# EAGLE board scrambler_v2 (EAGLE 5.06)
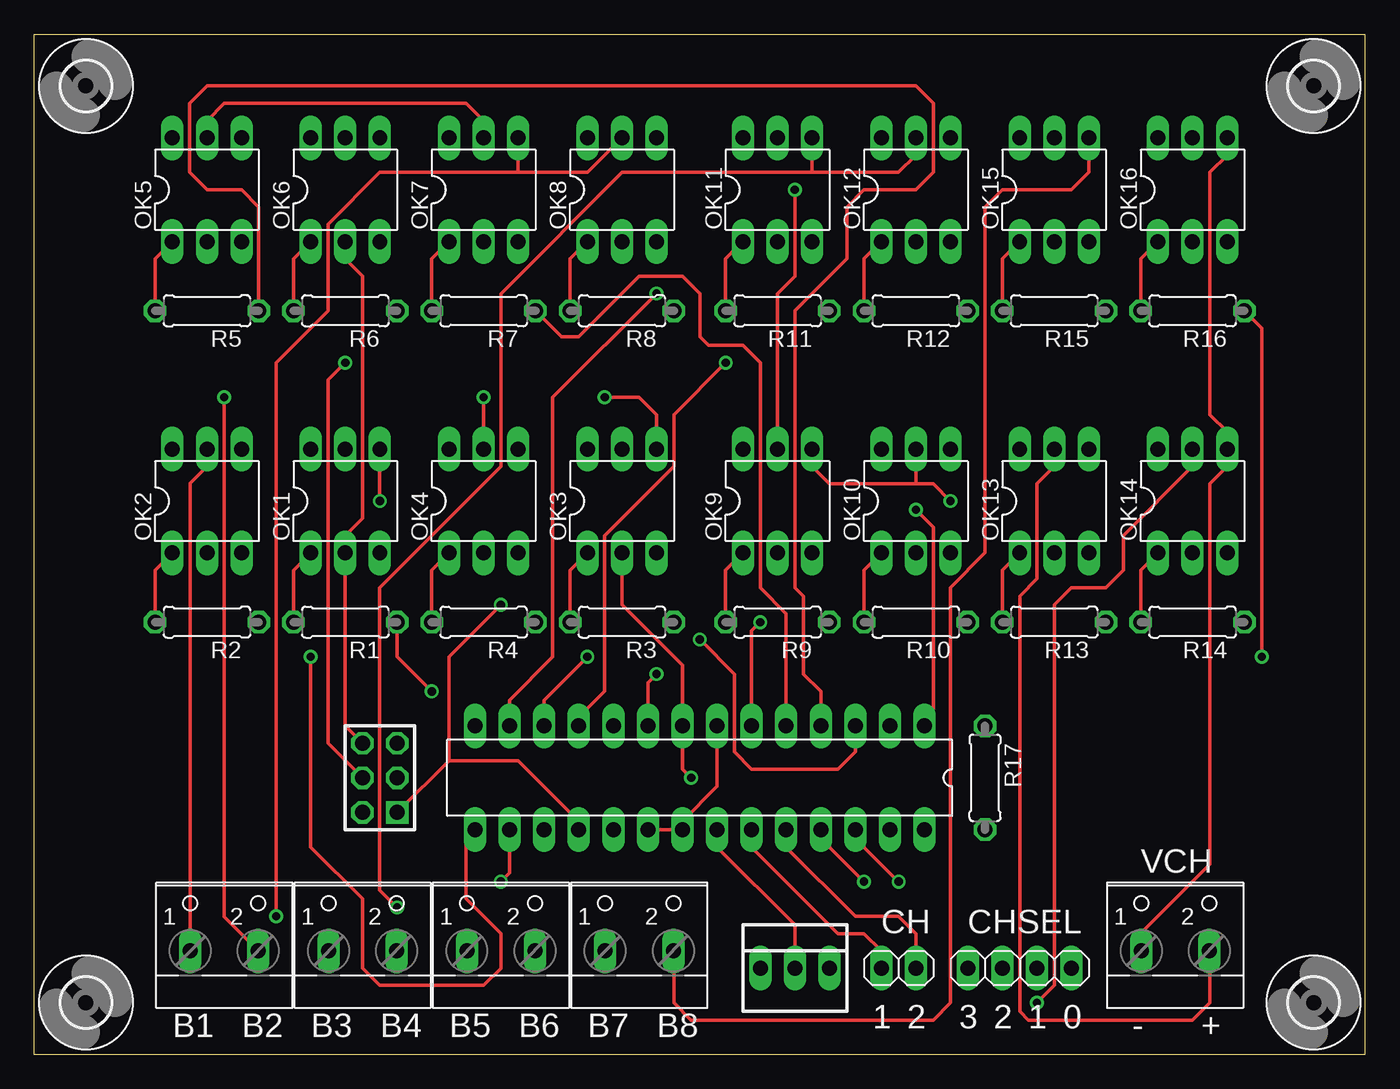
[diagram p0: board, top side]
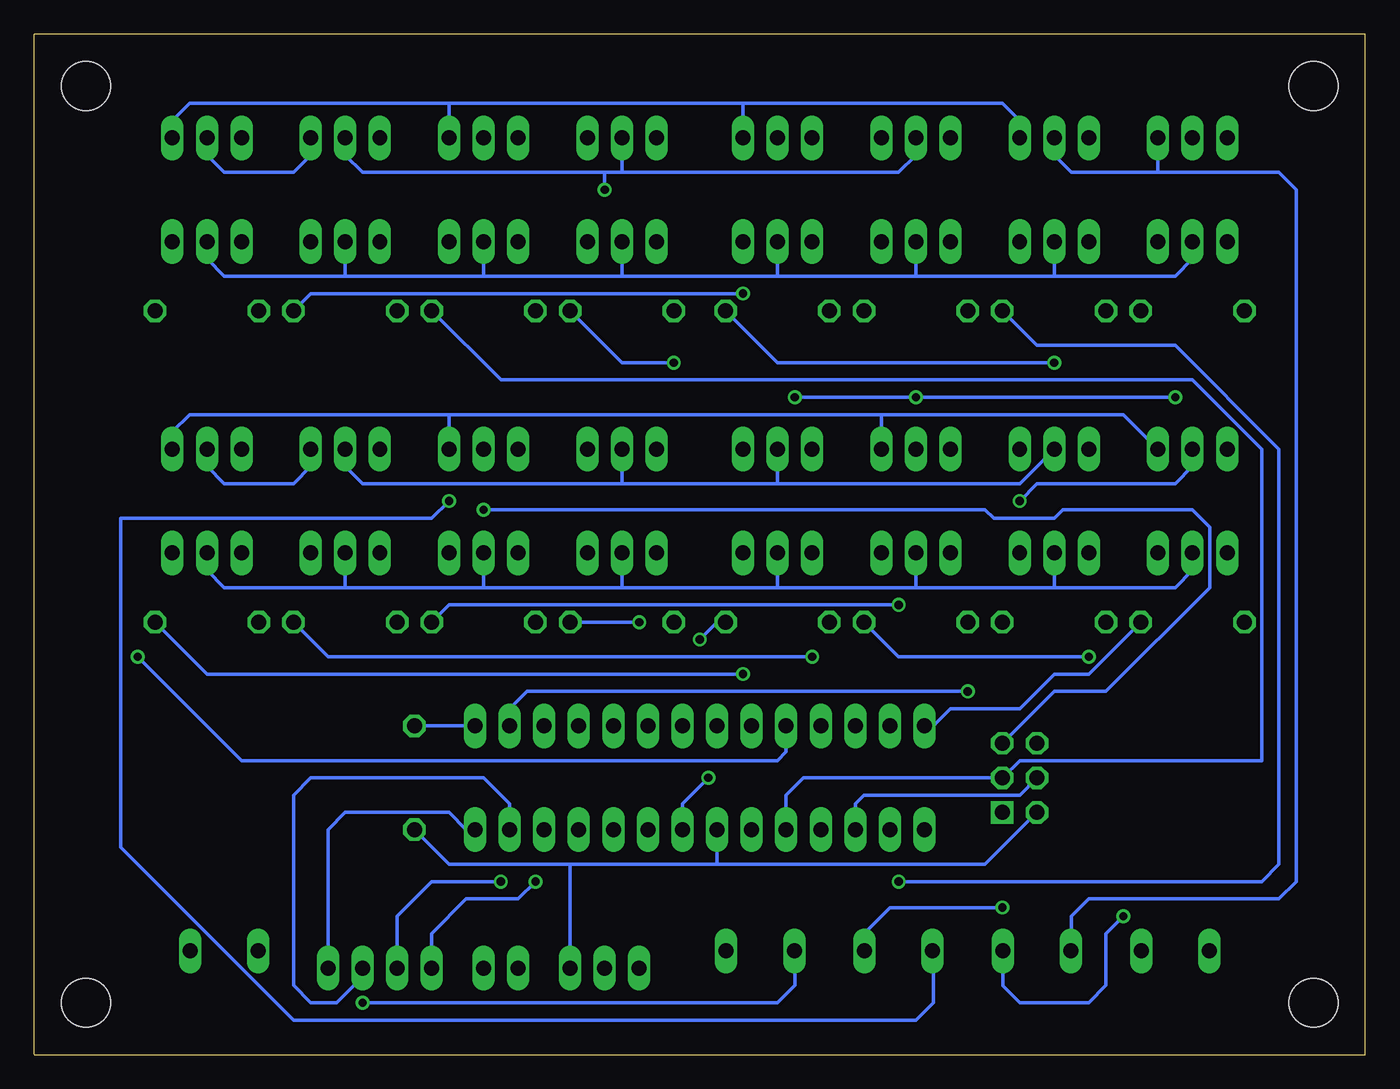
[diagram p1: board, bottom side, seen from below]

Size 97.79 x 74.93 mm. Coordinates in mm from the lower left corner, seen from the top.
Outline: 97.79,0.01 97.79,74.93 0,74.93 0,0 97.79,0
Copper layers (1*16): Top 0.035mm / dielectric 1.5mm / Bottom 0.035mm
Design rules "default": minimum track width 10mil, minimum drill 24mil, track to track 8mil, track to pad 8mil, pad to pad 8mil, via to via 8mil, smd to smd 8mil, copper to edge 40mil, drill to drill 8mil, minimum pad ring 10mil, minimum via ring 8mil, stop-mask expansion 4mil, vias tented up to drill 0mil, thermal gap 10mil

## Footprints (pad centres in the part's own frame; a part is rotated, then mirrored left to right if it is on the bottom)
DIL28-3 = drill 1.1 long: 1 -16.51,-3.81; 2 -13.97,-3.81; 3 -11.43,-3.81; 4 -8.89,-3.81; 5 -6.35,-3.81; 6 -3.81,-3.81; 7 -1.27,-3.81; 8 1.27,-3.81; 9 3.81,-3.81; 10 6.35,-3.81; 11 8.89,-3.81; 12 11.43,-3.81; 13 13.97,-3.81; 14 16.51,-3.81; 15 16.51,3.81; 16 13.97,3.81; 17 11.43,3.81; 18 8.89,3.81; 19 6.35,3.81; 20 3.81,3.81; 21 1.27,3.81; 22 -1.27,3.81; 23 -3.81,3.81; 24 -6.35,3.81; 25 -8.89,3.81; 26 -11.43,3.81; 27 -13.97,3.81; 28 -16.51,3.81
1X04 = drill 1.1 long: 1 -3.81,0; 2 -1.27,0; 3 1.27,0; 4 3.81,0
AVR-ISP-6 = drill 1.1 square: 1 -2.54,-1.27 | drill 1.1 octagon: 2 -2.54,1.27; 3 0,-1.27; 4 0,1.27; 5 2.54,-1.27; 6 2.54,1.27
1X02 = drill 1.1 long: 1 -1.27,0; 2 1.27,0
DIL06 = drill 1.1 long: 1 -2.54,-3.81; 2 0,-3.81; 3 2.54,-3.81; 4 2.54,3.81; 5 0,3.81; 6 -2.54,3.81
0207/7 = drill 1.1 octagon: 1 -3.81,0; 2 3.81,0
3,6 = hole 3.6: 0,0
22-23-2031 = drill 1.1 long: 1 -2.54,0; 2 0,0; 3 2.54,0
W237-102 = drill 1.1 long: 1 -2.5,-1.27; 2 2.5,-1.27

## Placement (x,y rotation side)
IC1  ATMEGA168  [DIL28-3]  48.9,20.32 180 top
JP1  [1X04]  72.39,6.35 0 top
JP2  AVR-ISP-6  [AVR-ISP-6]  25.4,20.32 90 top
JP3  [1X02]  63.5,6.35 0 top
OK1  H11D1  [DIL06]  22.86,40.64 0 top
OK2  H11D1  [DIL06]  12.7,40.64 0 top
OK3  H11D1  [DIL06]  43.18,40.64 0 top
OK4  H11D1  [DIL06]  33.02,40.64 0 top
OK5  H11D1  [DIL06]  12.7,63.5 0 top
OK6  H11D1  [DIL06]  22.86,63.5 0 top
OK7  H11D1  [DIL06]  33.02,63.5 0 top
OK8  H11D1  [DIL06]  43.18,63.5 0 top
OK9  H11D1  [DIL06]  54.61,40.64 0 top
OK10  H11D1  [DIL06]  64.77,40.64 0 top
OK11  H11D1  [DIL06]  54.61,63.5 0 top
OK12  H11D1  [DIL06]  64.77,63.5 0 top
OK13  H11D1  [DIL06]  74.93,40.64 0 top
OK14  H11D1  [DIL06]  85.09,40.64 0 top
OK15  H11D1  [DIL06]  74.93,63.5 0 top
OK16  H11D1  [DIL06]  85.09,63.5 0 top
R1  [0207/7]  22.86,31.75 180 top
R2  [0207/7]  12.7,31.75 180 top
R3  [0207/7]  43.18,31.75 180 top
R4  [0207/7]  33.02,31.75 180 top
R5  [0207/7]  12.7,54.61 180 top
R6  [0207/7]  22.86,54.61 180 top
R7  [0207/7]  33.02,54.61 180 top
R8  [0207/7]  43.18,54.61 180 top
R9  [0207/7]  54.61,31.75 180 top
R10  [0207/7]  64.77,31.75 180 top
R11  [0207/7]  54.61,54.61 180 top
R12  [0207/7]  64.77,54.61 180 top
R13  [0207/7]  74.93,31.75 180 top
R14  [0207/7]  85.09,31.75 180 top
R15  [0207/7]  74.93,54.61 180 top
R16  [0207/7]  85.09,54.61 180 top
R17  10 K  [0207/7]  69.85,20.32 270 top
U$1  [3,6]  93.98,71.12 180 top
U$2  [3,6]  3.81,71.12 180 top
U$3  [3,6]  3.81,3.81 180 top
U$4  [3,6]  93.98,3.81 180 top
X1  22-23-2031  [22-23-2031]  55.88,6.35 0 top
X2  [W237-102]  83.82,8.89 0 top
X3  [W237-102]  13.97,8.89 0 top
X4  [W237-102]  24.13,8.89 0 top
X5  [W237-102]  34.29,8.89 0 top
X6  [W237-102]  44.45,8.89 0 top

## Library data of the parts
IC1 JP1 JP3 OK1-OK16 R1-R17 U$1-U$4 X1-X6 = caixa
JP2 = ccard

## Nets
+5V: IC1.7 IC1.20 IC1.21 JP2.2 R17.2 X1.3
+12V: X1.1
/MIST1: IC1.2 R1.1
/MIST2: IC1.3 R3.1
/MIST3: IC1.4 R5.1
/MIST4: IC1.5 R7.1
/MIST5: IC1.6 R9.1
/MIST6: IC1.11 R11.1
/MIST7: IC1.12 R13.1
/MIST8: IC1.13 R15.1
BARRA1: OK1.4 OK2.5 X3.1
BARRA2: OK3.4 OK4.5 X3.2
BARRA3: OK5.4 OK6.5 X4.1
BARRA4: OK7.4 OK8.5 X4.2
BARRA5: OK9.4 OK10.5 X5.1
BARRA6: OK11.4 OK12.5 X5.2
BARRA7: OK13.4 OK14.5 X6.1
BARRA8: OK15.4 OK16.5 X6.2
CHOQUE1: IC1.23 JP3.1
CHOQUE2: IC1.24 JP3.2
CHSEL0: IC1.28 JP1.4
CHSEL1: IC1.27 JP1.3
CHSEL2: IC1.26 JP1.2
CHSEL3: IC1.25 JP1.1
GND: IC1.8 IC1.22 JP2.6 OK1.2 OK2.2 OK3.2 OK4.2 OK5.2 OK6.2 OK7.2 OK8.2 OK9.2 OK10.2 OK11.2 OK12.2 OK13.2 OK14.2 OK15.2 OK16.2 X1.2
MIST1: IC1.14 R2.1
MIST2: IC1.15 R4.1
MIST3: IC1.16 R6.1
MIST4: IC1.17 JP2.4 R8.1
MIST5: IC1.18 JP2.1 R10.1
MIST6: IC1.19 JP2.3 R12.1
MIST7: IC1.9 R14.1
MIST8: IC1.10 R16.1
N$1: OK1.1 R1.2
N$2: OK2.1 R2.2
N$3: OK3.1 R3.2
N$4: OK4.1 R4.2
N$5: OK5.1 R5.2
N$6: OK6.1 R6.2
N$7: OK7.1 R7.2
N$8: OK8.1 R8.2
N$9: OK9.1 R9.2
N$10: OK10.1 R10.2
N$11: OK11.1 R11.2
N$12: OK12.1 R12.2
N$13: OK13.1 R13.2
N$14: OK14.1 R14.2
N$15: OK15.1 R15.2
N$16: OK16.1 R16.2
RST: IC1.1 JP2.5 R17.1
VCH+: OK1.5 OK3.5 OK5.5 OK7.5 OK9.5 OK11.5 OK13.5 OK15.5 X2.2
VCH-: OK2.4 OK4.4 OK6.4 OK8.4 OK10.4 OK12.4 OK14.4 OK16.4 X2.1

## Tracks (layer width: path | path; a pad name or v marks a point on that pad's centre or on a via)
+5V
  Top 0.254: IC1.7 50.16,19.68 47.62,17.14 IC1.21 IC1.20
  Bottom 0.254: R17.2 67.31,13.97 58.42,13.97 | 58.42,13.97 X1.3 | JP2.2 27.94,13.97 47.62,13.97 | 47.62,13.97 58.42,13.97 | 47.62,13.97 IC1.21
/MIST1  (via drill 0.61)
  Top 0.254: v29.21,26.67 26.67,29.21 R1.1
  Bottom 0.254: v29.21,26.67 61.59,26.67 62.87,25.4 IC1.2
/MIST2  (via drill 0.61)
  Top 0.254: IC1.3 60.33,22.23 59.05,20.95 52.7,20.95 51.44,22.23 51.44,27.94 v48.9,30.48
  Bottom 0.254: v48.9,30.48 47.62,31.75 R3.1
/MIST3
  Top 0.254: R5.1 16.51,62.23 15.24,63.5 12.7,63.5 11.43,64.77 11.43,69.85 12.7,71.12 64.77,71.12 66.04,69.85 66.04,64.77 64.77,63.5 60.96,63.5 59.69,62.23 59.69,58.42 55.88,54.61 55.88,34.29 56.52,33.66 56.52,27.94 57.78,26.67 IC1.4
/MIST4
  Top 0.254: R7.1 38.73,52.7 40.01,52.7 44.45,57.15 47.62,57.15 48.9,55.88 48.9,52.7 49.53,52.07 52.07,52.07 53.34,50.8 53.34,34.29 55.24,32.38 IC1.5
/MIST5  (via drill 0.61)
  Top 0.254: IC1.6 52.7,31.11 v53.34,31.75
  Bottom 0.254: v53.34,31.75 R9.1
/MIST6  (via drill 0.61)
  Top 0.254: v50.8,50.8 46.99,46.99 46.99,43.18 41.91,38.1 41.91,26.67 40.01,24.77 IC1.11
  Bottom 0.254: R11.1 54.61,50.8 v50.8,50.8
/MIST7  (via drill 0.61)
  Top 0.254: v40.64,29.21 37.47,26.04 IC1.12
  Bottom 0.254: R13.1 76.2,29.21 v40.64,29.21
/MIST8  (via drill 0.61)
  Top 0.254: v45.72,55.88 38.1,48.26 38.1,29.21 34.92,26.04 IC1.13
  Bottom 0.254: R15.1 77.47,55.88 v45.72,55.88
BARRA1  (via drill 0.61)
  Top 0.254: v25.4,40.64 OK1.4 | X3.1 11.47,41.95 12.7,43.18 OK2.5
  Bottom 0.254: v25.4,40.64 24.13,41.91 13.97,41.91 12.7,43.18 OK2.5
BARRA2  (via drill 0.61)
  Top 0.254: v33.02,48.26 OK4.5 | OK3.4 45.72,46.99 44.45,48.26 v41.91,48.26 | v13.97,48.26 13.97,10.12 X3.2
  Bottom 0.254: v41.91,48.26 v33.02,48.26 v13.97,48.26
BARRA3
  Bottom 0.254: OK6.5 22.86,66.04 21.59,64.77 15.24,64.77 | 15.24,64.77 OK5.4 | 15.24,64.77 6.35,64.77 5.08,63.5 5.08,12.7 6.35,11.43 20.32,11.43 21.59,10.16 21.59,7.66 X4.1
BARRA4  (via drill 0.61)
  Top 0.254: OK8.5 40.64,64.77 35.56,64.77 | 35.56,64.77 OK7.4 | 35.56,64.77 25.4,64.77 21.59,60.96 21.59,54.61 17.78,50.8 v17.78,10.16
  Bottom 0.254: X4.2 26.63,5.04 25.4,3.81 20.32,3.81 19.05,5.08 19.05,8.89 v17.78,10.16
BARRA5  (via drill 0.61)
  Top 0.254: v67.31,40.64 66.04,41.91 64.77,41.91 | OK9.4 57.15,43.18 58.42,41.91 64.77,41.91 | 64.77,41.91 OK10.5
  Bottom 0.254: v67.31,40.64 68.58,39.37 91.44,39.37 91.44,15.24 78.74,2.54 33.02,2.54 31.75,3.81 31.75,7.58 X5.1
BARRA6  (via drill 0.61)
  Top 0.254: OK12.5 64.77,66.04 63.5,64.77 57.15,64.77 | 57.15,64.77 43.18,64.77 34.29,55.88 34.29,43.18 25.4,34.29 25.4,12.06 v26.67,10.79 | 57.15,64.77 OK11.4
  Bottom 0.254: v26.67,10.79 34.92,10.79 36.83,8.89 36.83,7.66 X5.2
BARRA7  (via drill 0.61)
  Top 0.254: v73.66,3.81 74.93,5.08 74.93,33.02 76.2,34.29 78.74,34.29 80.01,35.56 80.01,38.1 85.09,43.18 OK14.5
  Bottom 0.254: OK14.5 85.09,43.18 83.82,41.91 78.74,41.91 77.47,43.18 OK13.4 | v73.66,3.81 43.18,3.81 41.91,5.08 41.91,7.58 X6.1
BARRA8
  Top 0.254: OK15.4 77.47,64.77 76.2,63.5 71.12,63.5 69.85,62.23 69.85,36.83 67.31,34.29 67.31,3.81 66.04,2.54 48.26,2.54 46.99,3.81 46.99,7.58 X6.2
  Bottom 0.254: OK16.5 85.09,66.04 83.82,64.77 78.74,64.77 77.47,66.04 OK15.4
CHOQUE1
  Top 0.254: IC1.23 52.7,15.24 59.05,8.89 60.96,8.89 62.23,7.62 JP3.1
CHOQUE2
  Top 0.254: JP3.2 64.77,8.89 63.5,10.16 60.33,10.16 55.24,15.24 IC1.24
CHSEL0
  Bottom 0.254: IC1.28 66.04,16.51 67.31,17.78 74.93,17.78 76.2,16.51 JP1.4
CHSEL1
  Bottom 0.254: IC1.27 62.87,18.41 64.77,20.32 77.47,20.32 78.74,19.05 78.74,5.08 77.47,3.81 75.56,3.81 73.66,5.71 JP1.3
CHSEL2  (via drill 0.61)
  Top 0.254: v63.5,12.7 60.96,15.24 60.96,16.51 IC1.26
  Bottom 0.254: v63.5,12.7 68.58,12.7 71.12,10.16 JP1.2
CHSEL3  (via drill 0.61)
  Top 0.254: v60.96,12.7 58.42,15.24 58.42,16.51 IC1.25
  Bottom 0.254: v60.96,12.7 62.23,11.43 66.04,11.43 68.58,8.89 JP1.1
GND  (via drill 0.61)
  Top 0.254: OK3.2 43.18,33.02 47.62,28.57 IC1.8 47.62,20.95 v48.26,20.32 | JP2.6 22.86,24.13 OK1.2 22.86,38.1 24.13,39.37 24.13,57.15 22.86,58.42 OK6.2 | X1.2 55.88,9.53 50.16,15.24 IC1.22
  Bottom 0.254: 64.77,57.15 74.93,57.15 | 54.61,57.15 64.77,57.15 | 43.18,57.15 54.61,57.15 | 33.02,57.15 43.18,57.15 | 22.86,57.15 33.02,57.15 | 64.77,34.29 74.93,34.29 | 54.61,34.29 64.77,34.29 | 22.86,34.29 33.02,34.29 | OK16.2 85.09,58.42 83.82,57.15 74.93,57.15 | 74.93,57.15 OK15.2 | 64.77,57.15 OK12.2 | 54.61,57.15 OK11.2 | 43.18,57.15 OK8.2 | 33.02,57.15 OK7.2 | OK6.2 22.86,57.15 | 22.86,57.15 13.97,57.15 12.7,58.42 OK5.2 | OK14.2 85.09,35.56 83.82,34.29 74.93,34.29 | 74.93,34.29 OK13.2 | 64.77,34.29 OK10.2 | 54.61,34.29 OK9.2 | 43.18,34.29 54.61,34.29 | 43.18,34.29 OK3.2 | 33.02,34.29 43.18,34.29 | 33.02,34.29 OK4.2 | OK1.2 22.86,34.29 | 22.86,34.29 13.97,34.29 12.7,35.56 OK2.2 | v48.26,20.32 50.16,18.41 IC1.22
MIST1
  Bottom 0.254: R2.1 20.32,27.94 22.86,27.94 25.4,25.4 30.48,25.4 31.75,24.13 IC1.14
MIST2  (via drill 0.61)
  Top 0.254: v20.32,29.21 20.32,15.24 24.13,11.43 24.13,6.35 25.4,5.08 33.02,5.08 34.29,6.35 34.29,8.89 31.75,11.43 31.75,15.88 IC1.15
  Bottom 0.254: R4.1 34.29,29.21 v20.32,29.21
MIST3  (via drill 0.61)
  Top 0.254: IC1.16 34.92,13.34 v34.29,12.7
  Bottom 0.254: R6.1 24.13,52.07 13.97,52.07 6.35,44.45 6.35,13.97 7.62,12.7 v34.29,12.7
MIST4  (via drill 0.61)
  Top 0.254: v22.86,50.8 21.59,49.53 21.59,22.86 JP2.4
  Bottom 0.254: R8.1 43.18,50.8 v22.86,50.8 | JP2.4 25.4,19.05 36.83,19.05 37.47,18.41 IC1.17
MIST5  (via drill 0.61)
  Top 0.254: v34.29,33.02 30.48,29.21 30.48,21.59 | JP2.1 30.48,21.59 | 30.48,21.59 35.56,21.59 40.01,17.14 IC1.18
  Bottom 0.254: R10.1 67.31,33.02 v34.29,33.02
MIST6
  Bottom 0.254: R12.1 63.5,49.53 12.7,49.53 7.62,44.45 7.62,21.59 25.4,21.59 JP2.3 41.27,20.32 42.55,19.05 IC1.19
MIST7  (via drill 0.61)
  Top 0.254: v45.72,27.94 45.09,27.3 IC1.9
  Bottom 0.254: R14.1 85.09,27.94 v45.72,27.94
MIST8  (via drill 0.61)
  Top 0.254: R16.1 90.17,53.34 v90.17,29.21
  Bottom 0.254: v90.17,29.21 82.55,21.59 43.18,21.59 42.55,22.23 IC1.10
N$1
  Top 0.254: OK1.1 19.05,35.56 R1.2
N$2
  Top 0.254: OK2.1 8.89,35.56 R2.2
N$3
  Top 0.254: OK3.1 39.37,35.56 R3.2
N$4
  Top 0.254: OK4.1 29.21,35.56 R4.2
N$5
  Top 0.254: OK5.1 8.89,58.42 R5.2
N$6
  Top 0.254: OK6.1 19.05,58.42 R6.2
N$7
  Top 0.254: OK7.1 29.21,58.42 R7.2
N$8
  Top 0.254: OK8.1 39.37,58.42 R8.2
N$9
  Top 0.254: OK9.1 50.8,35.56 R9.2
N$10
  Top 0.254: OK10.1 60.96,35.56 R10.2
N$11
  Top 0.254: OK11.1 50.8,58.42 R11.2
N$12
  Top 0.254: OK12.1 60.96,58.42 R12.2
N$13
  Top 0.254: OK13.1 71.12,35.56 R13.2
N$14
  Top 0.254: OK14.1 81.28,35.56 R14.2
N$15
  Top 0.254: OK15.1 71.12,58.42 R15.2
N$16
  Top 0.254: OK16.1 81.28,58.42 R16.2
RST  (via drill 0.61)
  Top 0.254: v64.77,40.01 66.04,38.73 66.04,25.4 65.41,24.77 IC1.1
  Bottom 0.254: IC1.1 R17.1 | JP2.5 22.86,26.67 19.05,26.67 11.43,34.29 11.43,38.73 12.7,40.01 22.23,40.01 22.86,39.37 27.3,39.37 27.94,40.01 v64.77,40.01
VCH+  (via drill 0.61)
  Top 0.254: OK9.5 54.61,55.88 55.88,57.15 v55.88,63.5 | OK7.5 33.02,68.58 31.75,69.85 13.97,69.85 12.7,68.58 OK5.5 | OK13.5 74.93,43.18 73.66,41.91 73.66,34.92 72.39,33.66 72.39,3.17 73.03,2.54 85.09,2.54 86.36,3.81 86.36,7.58 X2.2
  Bottom 0.254: OK1.5 25.4,41.91 43.18,41.91 | 43.18,41.91 54.61,41.91 | OK15.5 74.93,66.04 73.66,64.77 55.88,64.77 | 55.88,64.77 54.61,64.77 | 54.61,64.77 OK11.5 | v55.88,63.5 55.88,64.77 | 54.61,64.77 34.29,64.77 33.02,66.04 OK7.5 | 54.61,41.91 OK9.5 | 43.18,41.91 OK3.5 | 54.61,41.91 73.66,41.91 74.93,43.18 OK13.5
VCH-
  Top 0.254: OK16.4 87.63,66.04 86.36,64.77 86.36,46.99 87.63,45.72 OK14.4 87.63,43.18 86.36,41.91 86.36,13.97 81.32,8.93 X2.1
  Bottom 0.254: 67.31,69.85 45.72,69.85 | OK2.4 17.78,46.99 35.56,46.99 | 35.56,46.99 67.31,46.99 | 67.31,69.85 86.36,69.85 87.63,68.58 OK16.4 | 67.31,69.85 OK12.4 | 45.72,69.85 OK8.4 | 45.72,69.85 26.67,69.85 25.4,68.58 OK6.4 | 35.56,46.99 OK4.4 | 67.31,46.99 OK10.4 | 67.31,46.99 86.36,46.99 87.63,45.72 OK14.4

## Text on the board
tNames: VCH | CH | CHSEL | 1 | 2 | 3 | 2 | 1 | 0 | B1 | B2 | B3 | B4 | B5 | B6 | B7 | B8 | - | +